# Altium PCB ThreePhaseMLI.PcbDoc (part 2 of 3)
Units mm, origin at the board's own origin, x right, y up, seen from the top; angles counter-clockwise.
Board outline 158.68 x 188.03 mm, 2 copper layers (Top Layer, Bottom Layer); 228 components, 175 nets, 606 pads, 93 vias.
Unrouted connection lines stored in the file: 12.
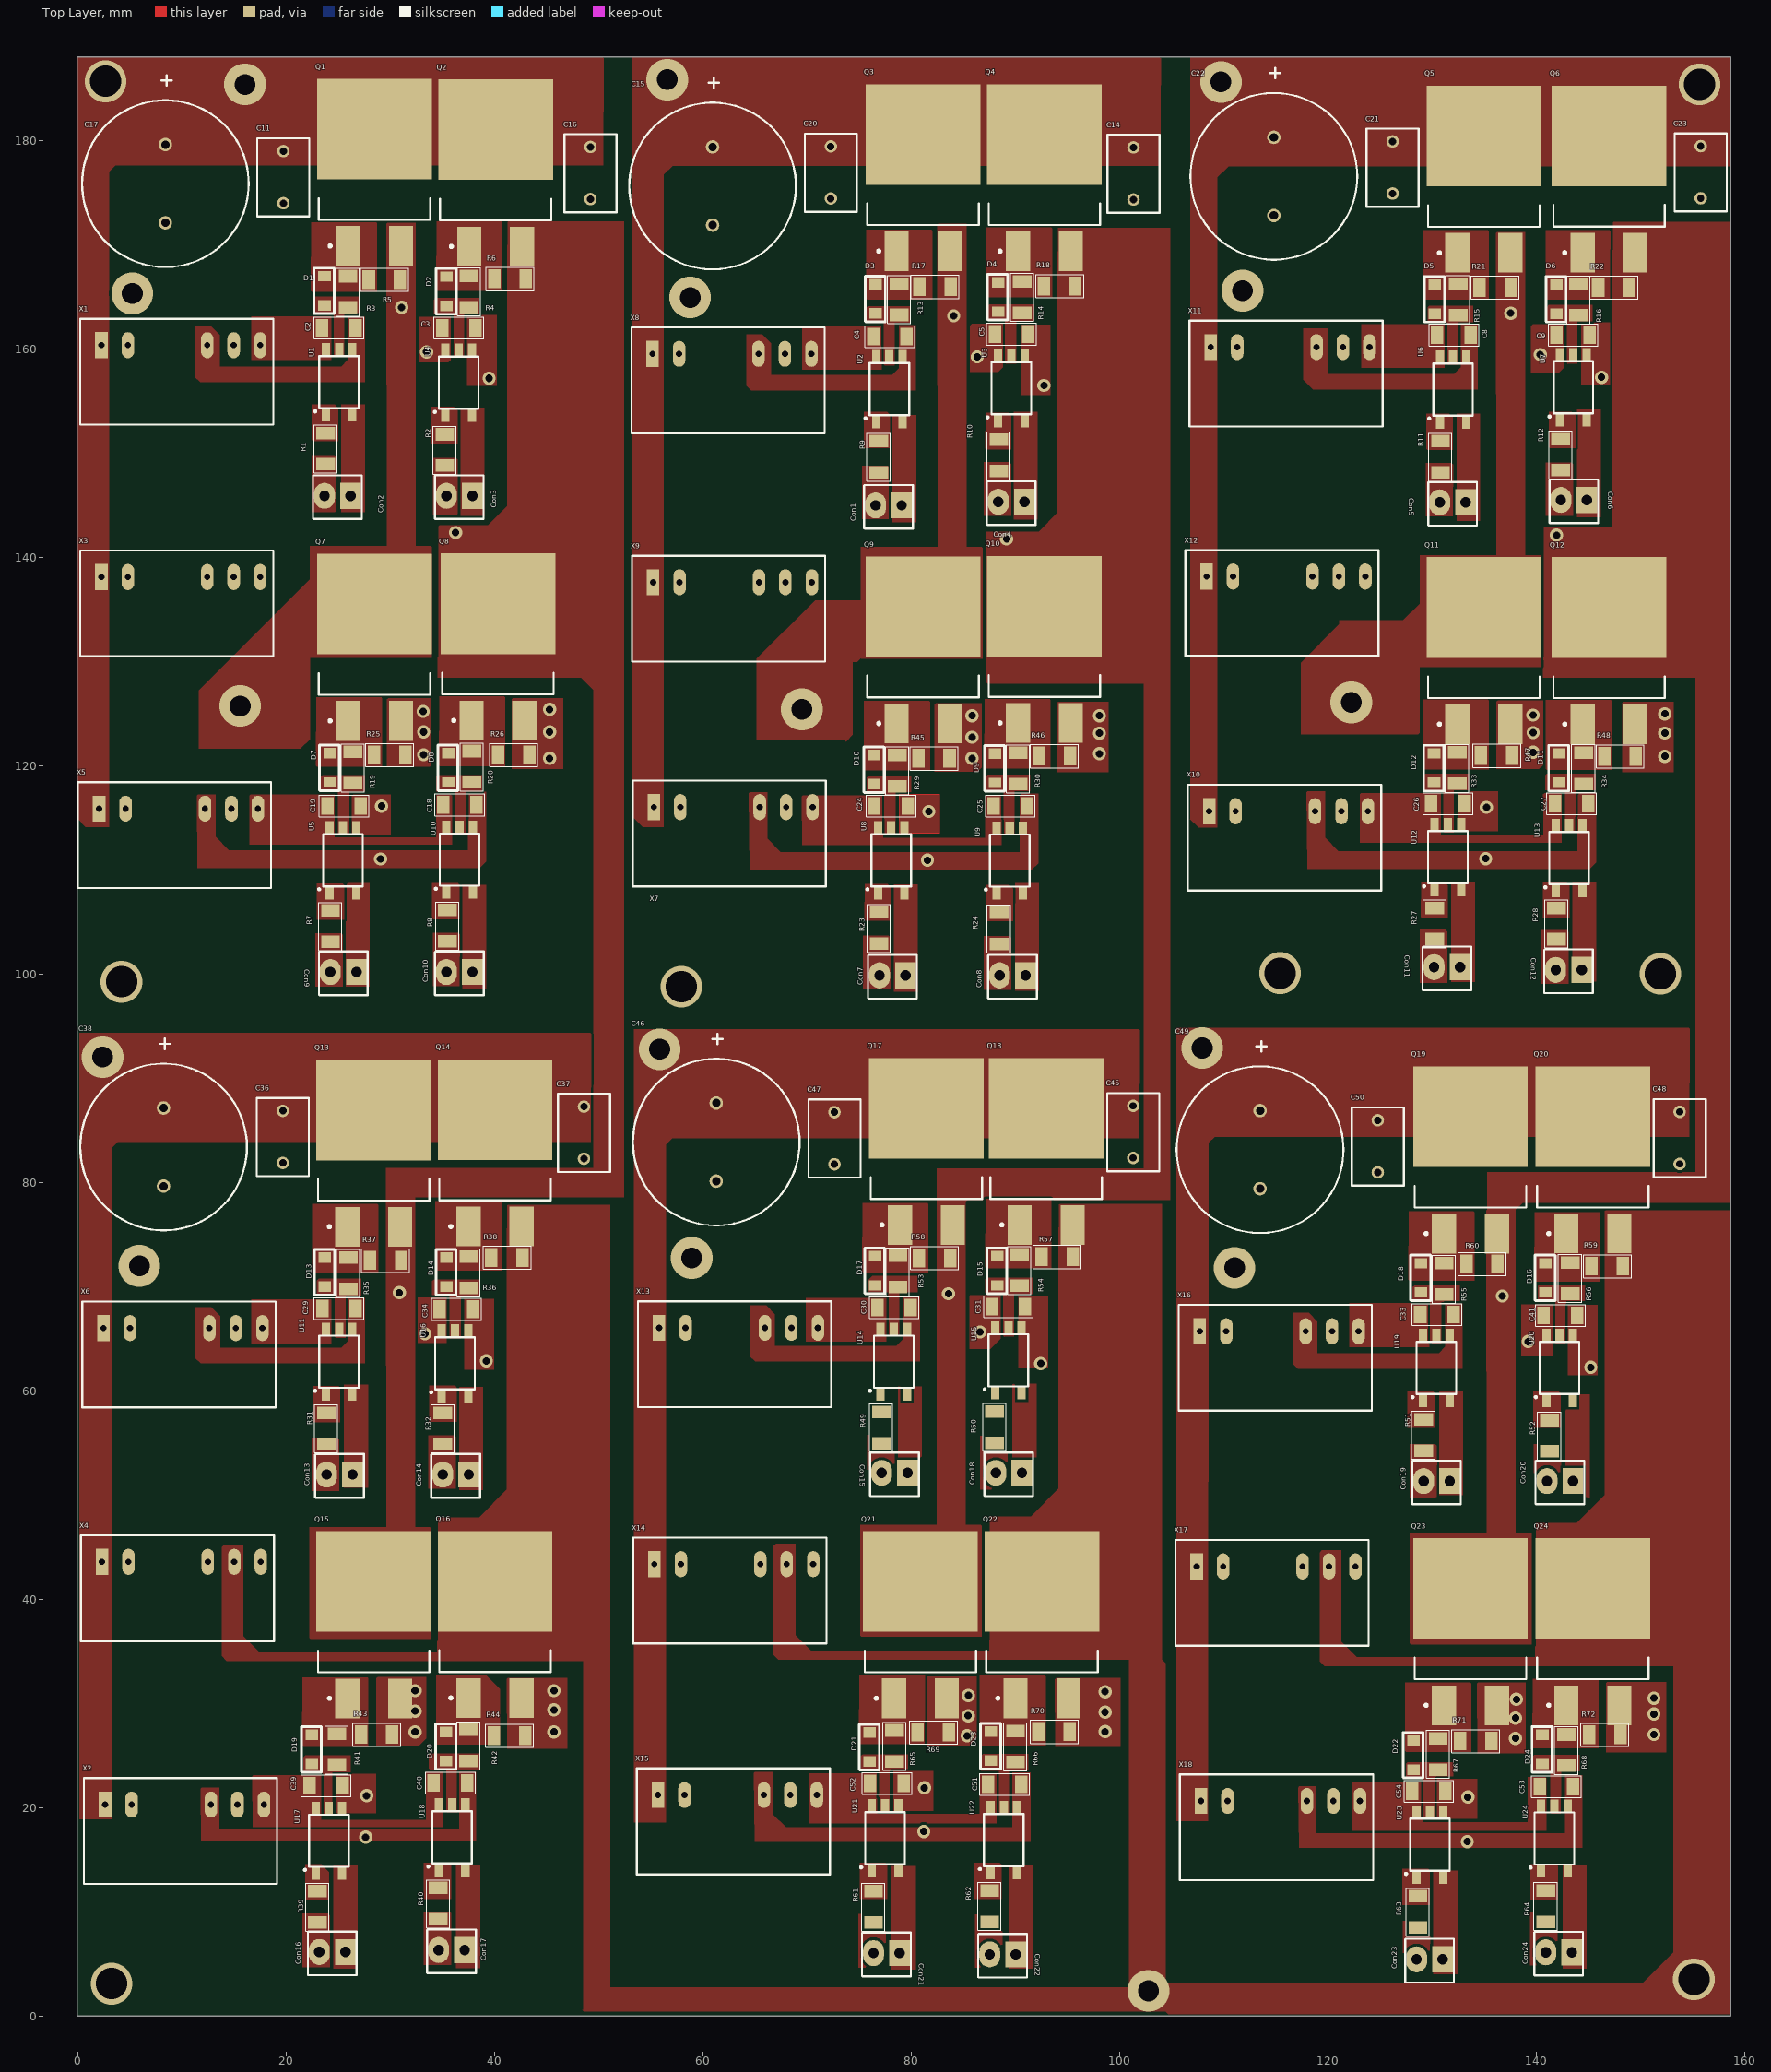
[diagram p0: Top Layer view]

## Polygon pours and split planes (outlines as drawn) (continued)
NetD3_2 on Top Layer "NETD3_2_L01_P048" (solid, pour order 48): 75.727,171.406 81.952,171.406 82.027,171.331 82.027,164.756 75.702,164.756
gnd6 on Top Layer "GND6_L01_P047" (solid, pour order 47): 19 vertices, not listed, extent 65.2,122.325 86.843,171.992
12v_2 on Top Layer "12V_2_L01_P043" (solid, pour order 43): 103.965,188.032 103.94,188.007 53.25,188.007 53.25,115.123 54.265,114.107 56.25,114.107 56.25,176.717 57.115,177.582 103.915,177.582
-5v2 on Top Layer "-5V2_L01_P041" (solid, pour order 41): 26.425,117.2 30.05,117.2 30.05,113.415 26.24,113.415 26.24,117.2
NetD8_2 on Top Layer "NETD8_2_L01_P039" (solid, pour order 39): 34.726,126.627 40.951,126.627 41.026,126.552 41.026,119.977 34.701,119.977
NetR2_2 on Top Layer "NETR2_2_L01_P036" (solid, pour order 36): 33.921,154.429 36.096,154.429 36.446,154.079 36.446,150.954 33.971,150.954 33.896,151.029
NetCon3_2 on Top Layer "NETCON3_2_L01_P035" (solid, pour order 35): 34.123,149.519 36.298,149.519 36.448,149.369 36.448,144.069 36.148,144.069 34.123,144.069
NetCon3_1 on Top Layer "NETCON3_1_L01_P034" (solid, pour order 34): 39.014,154.282 39.014,143.982 36.764,143.982 36.764,154.282
-5v1 on Top Layer "-5V1_L01_P033" (solid, pour order 33): 40.212,163.22 40.212,156.484 37.375,156.484 37.375,163.22
+15v1 on Top Layer "+15V1_L01_P032" (solid, pour order 32): 35.8,163.05 35.8,158.9 35.6,158.7 32.825,158.7 32.825,163.025 32.85,163.05
-5v2 on Top Layer "-5V2_L01_P031" (solid, pour order 31): 11.45,117.2 13.225,117.2 13.225,113.175 14.525,111.875 37.475,111.875 37.475,117.25 37.725,117.5 39.23,117.5 39.23,110.805 38.6,110.175 11.528,110.175
no net on Top Layer "NONET_L01_P030" (solid, pour order 30): 11.05,117.325
GND on Top Layer "GND_L01_P029" (solid, pour order 29): 41.691,126.45 46.6,126.45 46.6,120.434 46.6,119.691 41.705,119.691
GND on Top Layer "GND_L01_P028" (solid, pour order 28): 29.702,126.525 29.739,126.488 33.882,126.488 33.882,120.003 33.792,119.913 29.714,119.913
NetCon10_2 on Top Layer "NETCON10_2_L01_P027" (solid, pour order 27): 34.1,103.954 36.556,103.954 36.71,103.8 36.71,98.852 34.1,98.852
NetR8_2 on Top Layer "NETR8_2_L01_P026" (solid, pour order 26): 34.038,108.717 36.494,108.717 36.648,108.563 36.648,105.267 34.038,105.267